# Altium PCB SiPM_Carrier_Board.PcbDoc
Units mm, origin at the board's own origin, x right, y up, seen from the top; angles counter-clockwise.
Board outline 40 x 15 mm, 4 copper layers (Top Layer, GND, Power, Bottom Layer), stack 1.62 mm thick; 26 components, 15 nets, 74 pads, 51 vias.
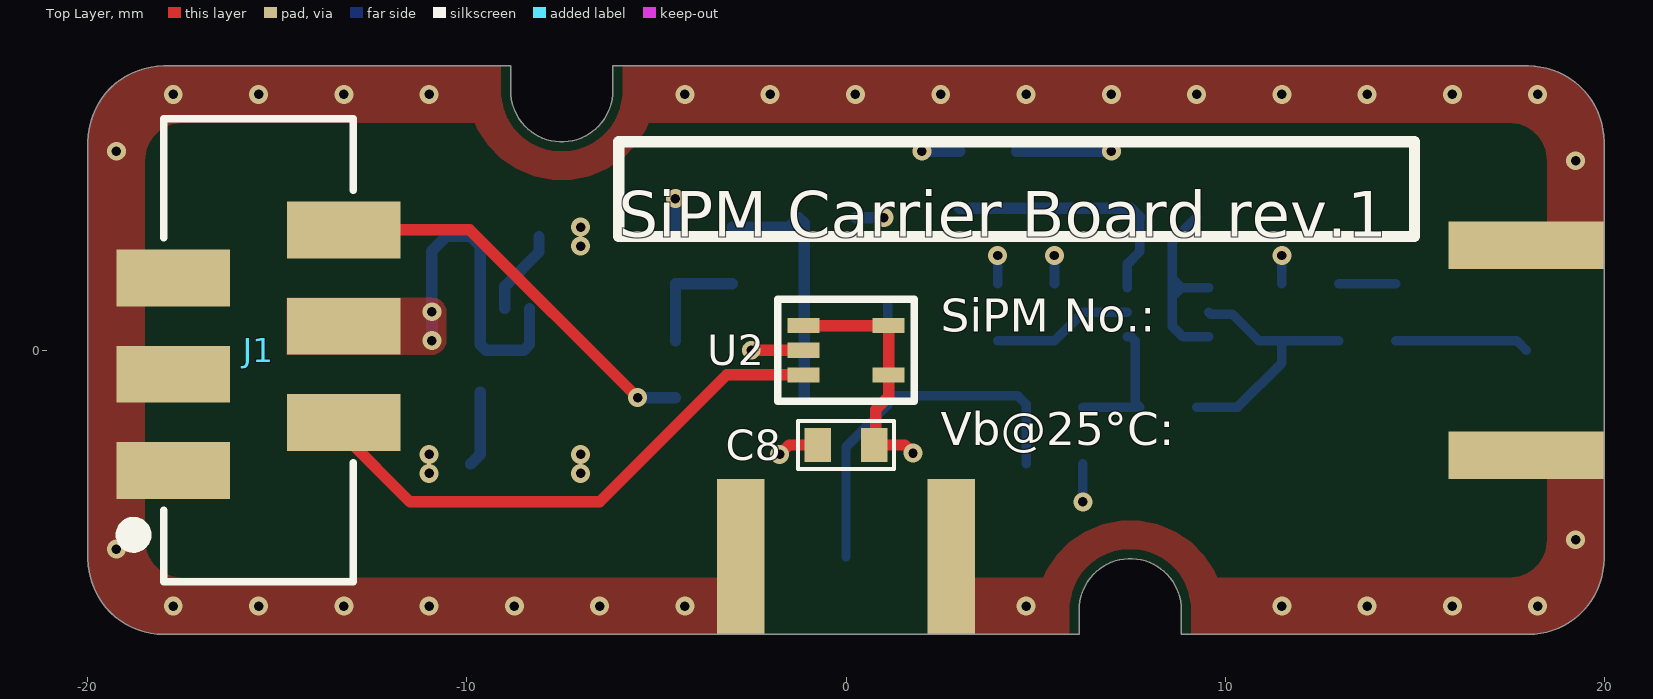
[diagram p0: Top Layer view]
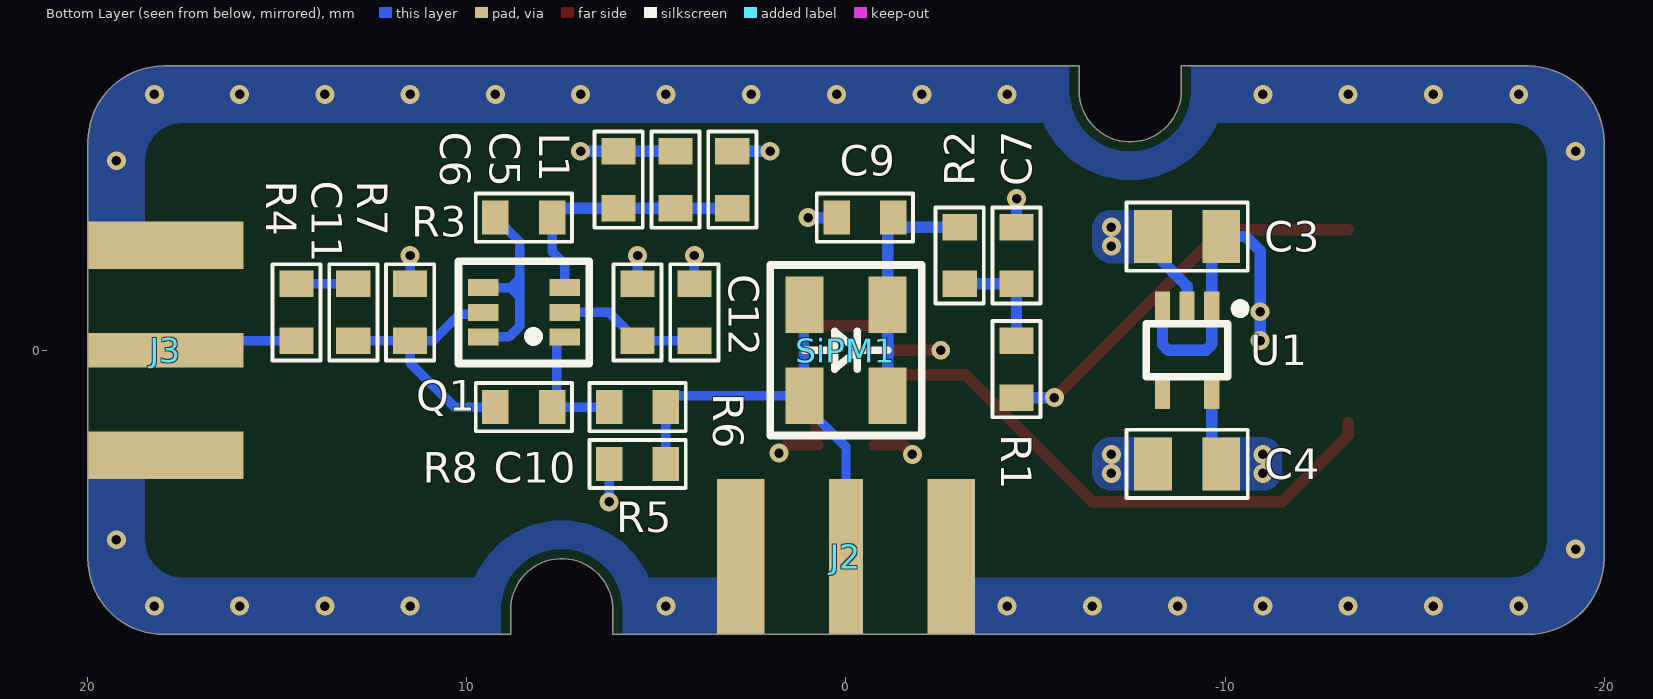
[diagram p1: Bottom Layer view, seen from below]
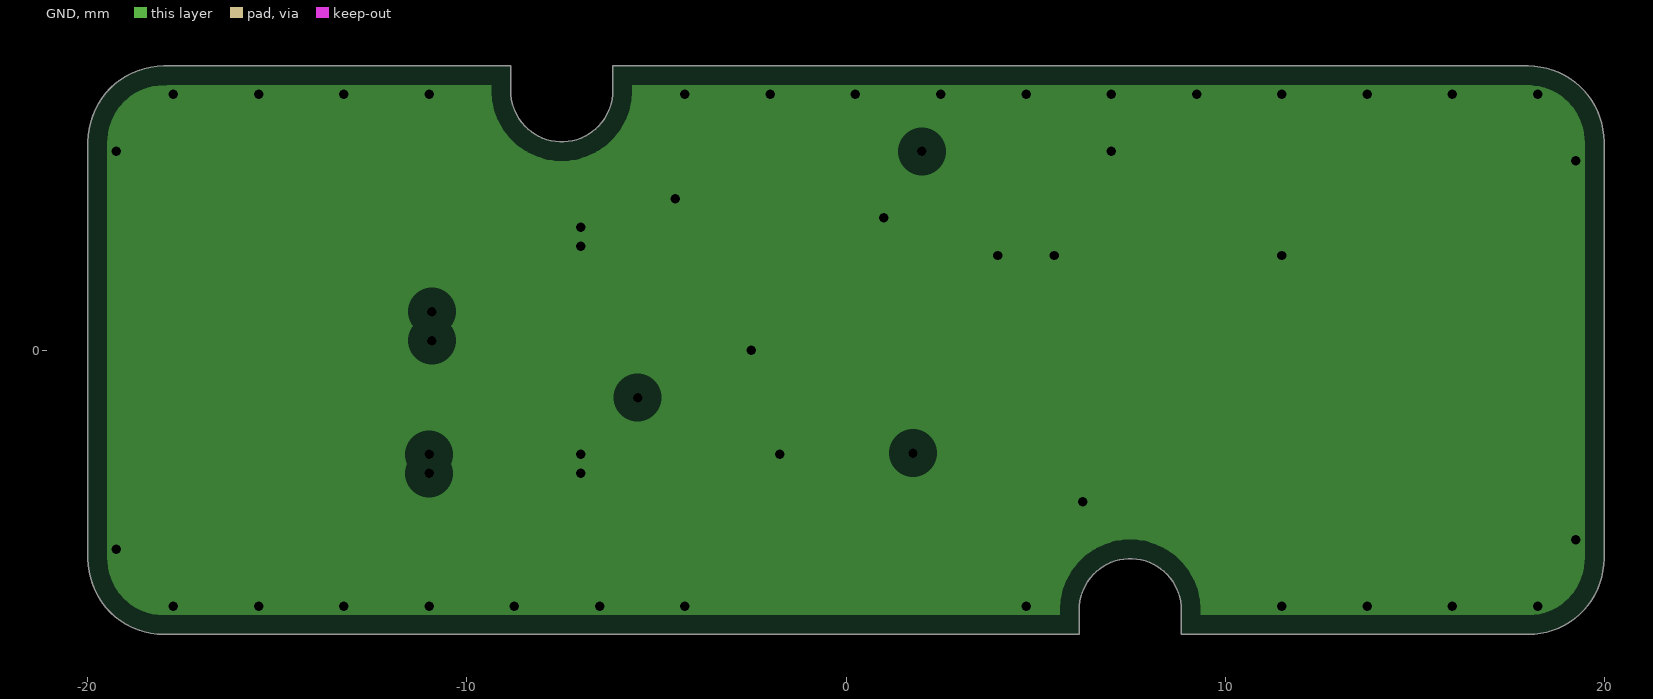
[diagram p2: GND, clearances drawn from the general rule]
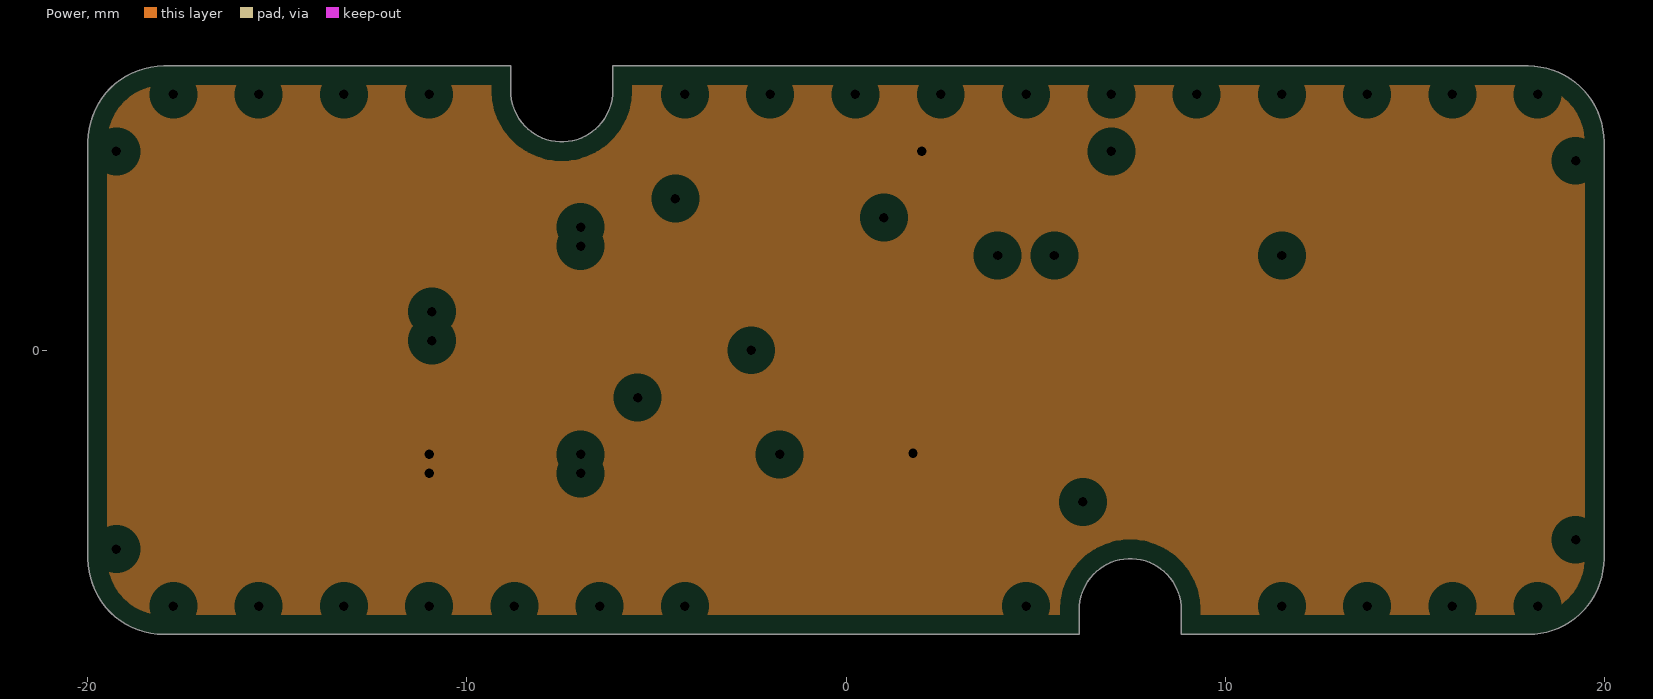
[diagram p3: Power, clearances drawn from the general rule]

## Layer stack, top to bottom
Top Solder: solder mask 0.01, Solder Resist, Dk 3.5
Top Layer: signal copper 0.035
Dielectric 1: prepreg 0.14, PP-006, Dk 4.1
GND: plane copper 0.035, net GND
Dielectric1: core 1.2, FR-4, Dk 4.8
Power: plane copper 0.035, net 3V3_VCC
Dielectric 2: prepreg 0.14, PP-006, Dk 4.1
Bottom Layer: signal copper 0.035
Bottom Solder: solder mask 0.01, Solder Resist, Dk 3.5

## Board outline
-20,-5.5 -20,5.5 cw(c-18,5.5) -18,7.5 -8.85,7.5 -8.85,6.85 ccw(c-7.5,6.85) -6.15,6.85 -6.15,7.5 18,7.5 cw(c18,5.5) 20,5.5 20,-5.5 cw(c18,-5.5) 18,-7.5 8.85,-7.5 8.85,-6.85 ccw(c7.5,-6.85) 6.15,-6.85 6.15,-7.5 -18,-7.5 cw(c-18,-5.5)

## Design rules (kind name [scope] priority, off if disabled: settings)
Clearance [All] p1: gap=0.25 ignorepadtopadclearanceinfootprint=TRUE except(0: Arc-Hole Track-Hole SMDPad-Hole THPad-Hole Via-Hole Fill-Hole Poly-Hole Region-Hole Text-Hole)
FabricationTestPointUsage TestPointUsage [All] p1: valid=0 allowmultiple=FALSE
FabricationTestpoint Testpoint [All] p1: side=3 testpointundercomponent=TRUE minsize=1.016 maxsize=2.54 preferedsize=1.524 minholesize=0 maxholesize=1.016 preferedholesize=0.813 testpointgrid=0.025 allowsidetop=TRUE allowsidebottom=TRUE usegrid=TRUE gridtolerance=0
PlaneClearance [All] p1: clearance=0.508
PlaneConnect [All] p1: planeconnectstyle=Direct reliefexpansion=0.508 reliefentries=4 reliefconductorwidth=0.254 reliefairgap=0.254
PolygonConnect PC_GND [InNet('GND')] p1: thpad.connectstyle=Relief thpad.reliefconductorwidth=0.25 thpad.reliefentries=4 thpad.polygonreliefangle="90 Angle" thpad.airgapwidth=0.25 smdpad.connectstyle=Direct smdpad.reliefconductorwidth=0.25 smdpad.reliefentries=4 smdpad.polygonreliefangle="90 Angle" smdpad.airgapwidth=0.25 via.connectstyle=Direct via.reliefconductorwidth=0.25 via.reliefentries=4 via.polygonreliefangle="45 Angle" via.airgapwidth=0.25
PolygonConnect [All] p2: connectstyle=Direct reliefconductorwidth=0.254 reliefentries=4 polygonreliefangle="90 Angle" airgapwidth=0.254
RoutingVias [All] p1: holewidth=0.711 width=1.27 viastyle="Through Hole" minholewidth=0.711 minwidth=1.27 maxholewidth=0.711 maxwidth=1.27
SilkToSolderMaskClearance SilkscreenOverComponentPads [IsPad] p1: minsilkscreentomaskgap=0.254 clearancetoexposedcopper=TRUE
SolderMaskExpansion [All] p1: expansion=0.102 istentingtop=FALSE
Width [All] p1: maxlimit=1 minlimit=0.2 preferedwidth=0.25
25 further rules are at their usual default settings.

## Components (designator, comment, footprint, x,y, rotation, side; value= is the part's Value field where it differs from the comment)
C3 "1uF 10% 10V" 0805_CAP -9,3 r180 bottom
C4 "1uF 10% 10V" 0805_CAP -9,-3 r180 bottom
C5 "100nF 10% 16V" 0603_CAP 4.5,4.5 r270 bottom
C6 "100nF 10% 16V" 0603_CAP 6,4.5 r270 bottom
C7 "100nF 10% 50V" 0603_CAP -4.5,2.5 r90 bottom
C8 "100nF 10% 16V" 0603_CAP 0,-2.5 r0 top
C9 "100nF 10% 50V" 0603_CAP -0.5,3.5 r0 bottom
C10 "100nF 10% 16V" 0603_CAP 5.5,-1.5 r0 bottom
C11 "100nF 10% 16V" 0603_CAP 13,1 r90 bottom
C12 "10nF 10% 16V" 0603_CAP 4,1 r270 bottom
J1 "690367290676" 690367290676 -15.5,0 r270 top
J2 "60312202111527" 60312202111527 0,-7.5 r180 bottom
J3 "60312202111527" 60312202111527 20,0 r270 bottom
L1 "742861210" 0603_RES 3,4.5 r270 bottom
Q1 "BFU520Y" SOT363-6 8.5,1 r0 bottom
R1 "100R 1% 0.1W" 0603_RES -4.5,-0.5 r90 bottom
R2 "100R 1% 0.1W" 0603_RES -3,2.5 r90 bottom
R3 "1k 1% 0.1W" 0603_RES 8.5,3.5 r0 bottom
R4 "49R9 1% 0.1W" 0603_RES 14.5,1 r90 bottom
R5 "10k 1% 0.1W" 0603_RES 5.5,-3 r0 bottom
R6 "750R 1% 0.1W" 0603_RES 5.5,1 r90 bottom
R7 "200R 1% 0.1W" 0603_RES 11.5,1 r90 bottom
R8 "1k 1% 0.1W" 0603_RES 8.5,-1.5 r180 bottom
SiPM1 "PM3375T" PM3375T_SMD 0,0 r180 bottom locked
U1 "TLV70033DCKR" TI-DCK5_V -9,0 r270 bottom
U2 "LM94021" SC70 0,0 r0 top

## Footprints (in the part's own frame and the unit in brackets; to place one, negate y for a bottom-side part, rotate by r counter-clockwise, add the part's x,y. Pads: shape width x height; smd on the part's side, far side on the other; paste and mask are expansions set on the pad)
0603_CAP [mm] "Chip Capacitor, 1.6mm x 0.8mm x 0.45mm"
  rect 0.7x0.9 smd: 1(-0.75,0) 2(0.75,0)
  silkscreen extent -1.27,-0.64 1.27,0.64, body extent -0.8,-0.4 0.8,0.4, height 0.45
0603_RES [mm] "Chip Resistor, 1.6mm x 0.8mm x 0.45mm"
  rect 0.7x0.9 smd: 1(-0.75,0) 2(0.75,0)
  silkscreen extent -1.27,-0.64 1.27,0.64, body extent -0.8,-0.4 0.8,0.4, height 0.45
0805_CAP [mm] "Chip Capacitor, 2.0mm x 1.25mm x 0.55mm"
  rect 1x1.4 smd: 1(-0.9,0) 2(0.9,0)
  silkscreen extent -1.6,-0.9 1.6,0.9, body extent -1,-0.62 1,0.63, height 0.55
690367290676 [mm] "MiniModule Connectors, PCB Type, Female, SMT, Vertical, 6p"
  rect 1.5x3 smd: 1(3.175,-2.25) 2(1.905,2.25) 3(0.635,-2.25) 4(-0.635,2.25) 5(-1.905,-2.25) 6(-3.175,2.25)
  silkscreen extent -6.11,-3.52 6.11,2.5, body extent -6.11,-3.5 6.11,3.5, height 5.75
60312202111527 [mm] "SMA PCB End Launch  Jack"
  rect 0.9x4.1 smd: 1(0,2.05)
  rect 1.25x4.1 smd: 2(-2.775,2.05) 3(2.775,2.05)
  rect 1.25x4.1 smd far side: 4(-2.775,2.05) 5(2.775,2.05)
  body extent -3.18,-9.52 3.17,3.81, height 3.55
PM3375T_SMD [mm]
  rect 1x1.5 smd: 1(1.1,-1.2) 1(1.1,1.2) 2(-1.1,-1.2) 2(-1.1,1.2)
  silkscreen extent -2,-2.25 2,2.25, body extent -1.9,-2.15 1.9,2.15, height 1.75
SC70 [mm] "SOT23, 5-Leads, Body 2.00x2.10mm, Pitch 0.65mm, IPC Medium Density"
  rect 0.85x0.4 smd: 1(-1.125,0.65) 2(-1.125,0) 3(-1.125,-0.65) 4(1.125,-0.65) 5(1.125,0.65)
  silkscreen extent -1.8,-1.35 1.8,1.35, body extent -1.2,-1.07 1.2,1.07, height 1.1
SOT363-6 [mm] "SOT23, 6-Leads, Body 2,00x2,10mm, Pitch 0,65mm, IPC Medium Density"
  rect 0.8x0.45 smd: 1(-1.075,0.65) 2(-1.075,0) 3(-1.075,-0.65) 4(1.075,-0.65) 5(1.075,0) 6(1.075,0.65)
  silkscreen extent -1.73,-1.35 1.73,1.35, body extent -1.15,-1.1 1.15,1.1, height 1.1
TI-DCK5_V [mm] "SOT23, 5-Leads, Body 2x1.25mm, Pitch 0.65mm"
  rect 0.9x0.4 smd: 1(-1.1,0.65) 2(-1.1,0) 3(-1.1,-0.65) 4(1.1,-0.65) 5(1.1,0.65)
  silkscreen extent -1.22,-1.07 0.7,1.52, body extent -0.63,-1 0.63,1, height 1.1

## Part data
C3 C4 C5 C6 C7 C8 C9 C10 C11 C12: library part Capacitor, "Simple generic capacitor."
  C3 C4: PackageReference=0805
  C5 C6 C7 C8 C9 C10 C11 C12: PackageReference=0603
J1: "WR-MM MiniModule Connector, Female, SMT, Vertical, pitch 2.54mm, 6pins", Contact Resistance=10mOhm, Insulation Resistance=>1000MOhm, Operating Temperature="-40 to +105degC", Rated Current=1.5A, Withstanding Voltage=500VAC, Working Voltage=100VAC, ComponentLink1Description=Manufacturer, ComponentLink1URL=http://www.we-online.de, ComponentLink2Description=Datasheet, ComponentLink2URL=https://katalog.we-online.de/em/datasheet/690367290676.pdf, Gender=Female, Mounting Technology=SMT, Orientation=Vertical, Packaging="Tape and Reel", Part Number=690367290676, Pin Number=6, Pitch=2.54mm, Published Date="June 2019", Publisher="Wurth Elektronik"
J2 J3: "WR-SMA PCB End Launch Jack Round Post for 1.6mm PCB, SMT, Straight", Frequency Range=DC~18GHz, Operating Temperature="-65 to +165degC", Center Contact Diameter=0.76mm, ComponentLink1Description=Manufacturer, ComponentLink1URL=http://www.we-online.de, ComponentLink2Description=Datasheet, ComponentLink2URL=https://katalog.we-online.com/em/datasheet/60312202111527.pdf, Connector Type=SMA, Gender=Jack, Impedance=50Ohm, Interface=MIL-STD-348, Mounting Technology=SMT, Orientation Type=Straight, Packaging=Tray, Part Number=60312202111527, Published Date="May 2019", Publisher="Wurth Elektronik"
L1: library part Inductor, "Simple generic inductor.", PartNumber=XXX, PackageReference=0603
Q1: "Dual NPN wideband silicon RF transistor.", PackageReference=SOT363-6
R1 R2 R3 R4 R5 R6 R7 R8: library part Resistor, "Simple generic resistor.", PackageReference=0603
SiPM1: "Silicon Photomultiplier, 3x3mm2 - 75um type - trench - SMD housing"
U1: "Single Output LDO, 200 mA, Fixed 3.3 V Output, 2 to 5.5 V Input, with Low IQ, 5-pin SC70 (DCK), -40 to 125 degC, Green (RoHS & no Sb/Br)", Manufacturer="Texas Instruments", Supplier Part Number 1=296-32413-2-ND, Accuracy(%)=2, Code_JEDEC=MO-203, ComponentLink1Description="Manufacturer URL", ComponentLink1URL=http://www.ti.com/, ComponentLink2Description=Datasheet, ComponentLink2URL=http://www.ti.com/general/docs/lit/getliterature.tsp?genericPartNumber=TLV70033&fileType=pdf, ComponentLink3Description="Package Specification", ComponentLink3URL=http://www.ti.com/litv/pdf/mpds025f, DatasheetVersion=SLVSA00D, Eco-Plan="Green (RoHS & no Sb/Br)", Fixed Output Options(V)=3.3, Iout(Max)(A)=0.2, Iq(Typ)(mA)=0.03, Mounting Technology="Surface Mount", PackageDescription="5-Pin Plastic Small-Outline, Body 2 x 1.25 mm, Pitch 0.65 mm", PackageReference=DCK5, PackageVersion=4093553-3/G, PartNumber=TLV70033DCKR, SubFamily="Single Channel LDO", Supplier 1=Digi-Key, Supplier 2=Digi-Key, Supplier 3=Digi-Key, Supplier 4=Newark, Supplier 5=Mouser, Supplier Part Number 2=296-32413-1-ND, Supplier Part Number 3=296-32413-6-ND, Supplier Part Number 4=55R7467, Supplier Part Number 5=595-TLV70033DCKR, Vdo(Typ)(mV)=175, Vin(Max)(V)=5.5, Vin(Min)(V)=2, Vout Adj(Max)(V)=3.3, Vout Adj(Min)(V)=3.3
U2: "Multi-Gain Analog Temperature Sensor.", Manufacturer="Texas Instruments", PartNumber=LM94021BIMG, PackageReference=SC70

## Via types
v1: diameter 0.5, hole 0.25, Top Layer to Bottom Layer, 32 vias
v2: diameter 0.5, hole 0.25, Top Layer to Bottom Layer, tented both sides, 19 vias

## Nets (pads, with @x,y where several pads share a name; then routed paths per layer and width w, separated by ;. In a path a pad name is that pad's centre, name@x,y a point inside that pad or via, vN(x,y) a via of type N, cw(c..) or ccw(c..) an arc to the next point about the centre after c; other vN are vias at no path point)
3V3_AMP: C5.2 C6.2 L1.2 Q1.3 R3.1 | length 6.8
  Bottom Layer w0.254: Q1.3 7.425,2.275 7.75,2.6 R3.1
  Bottom Layer w0.3: L1.2 C5.2 C6.2 7.5,3.75 R3.1
3V3_VCC: C4.2 C8.2 L1.1 U1.5 U2.1 U2.4 U2.5 | length 9.7
  Top Layer w0.3: U2.1 U2.5 U2.4 1.125,-1.225 0.785,-1.565 0.785,-2.465 C8.2 1.554,-2.5 v2(1.768,-2.714)
  Bottom Layer w0.3: C4.2 -9.65,-2.75 U1.5 ; v2(2,5.25) L1.1
  other v2: -11,-3.25 -11,-2.75
5V_IN: C3.2 J1.4 U1.1 U1.3 | length 8.9
  Bottom Layer w0.3: v2(-10.928,0.254) v2(-10.928,1.016) -10.928,2.617 -10.545,3 C3.2 -9.65,2.75 U1.1 -9.65,0.15 -9.5,0 -8.5,0 -8.35,0.15 U1.3
GND: C3.1 C4.1 C5.1 C6.1 C7.2 C8.1 C9.2 C12.1 J1.1 J1.3 J1.5 J2.2 J2.3 J2.4 J2.5 J3.2 J3.3 J3.4 J3.5 R5.2 R6.2 R7.2 U1.2 U2.2 | length 12
  Top Layer w0.3: v2(-2.5,0) U2.2 ; v2(-1.75,-2.75) -1.5,-2.5 C8.1
  Bottom Layer w0.254: C12.1 v2(4,2.5) ; R6.2 v2(5.5,2.5) ; v2(6.25,-4) R5.2 ; R7.2 v2(11.5,2.5)
  Bottom Layer w0.3: U1.2 -9,1.691 -8.1,2.591 C3.1 ; C7.2 v2(-4.5,4) ; C9.2 v2(1,3.5) ; C5.1 C6.1 v2(7,5.25)
  other v1: -17.75,-6.75 -15.5,-6.75 -13.25,-6.75 -11,-6.75 -8.75,-6.75 -6.5,-6.75 -4.25,-6.75 4.75,-6.75 11.5,-6.75 13.75,-6.75 16,-6.75 18.25,-6.75 -19.25,-5.25 19.25,-5 19.25,5 -19.25,5.25 -17.75,6.75 -15.5,6.75 -13.25,6.75 -11,6.75 -4.25,6.75 -2,6.75 0.25,6.75 2.5,6.75 4.75,6.75 7,6.75 9.25,6.75 11.5,6.75 13.75,6.75 16,6.75 18.25,6.75
  other v2: -7,-3.25 -7,-2.75 -7,2.75 -7,3.25
NetC7_1: C7.1 R1.2 R2.1 | length 3
  Bottom Layer w0.3: R1.2 C7.1 R2.1
NetC9_1: C9.1 R2.2 SiPM1.1 | length 6.6
  Bottom Layer w0.3: R2.2 -1.5,3.25 C9.1 -1.1,3.35 -1.1,1.2 SiPM1.1@-1.1,-1.2
NetC10_1: C10.1 J2.1 R5.1 SiPM1.2 | length 12.4
  Bottom Layer w0.25: J2.1 0,-2.55 1.1,-1.45 SiPM1.2@1.1,-1.2 ; SiPM1.2@1.1,1.2 SiPM1.2@1.1,-1.2 ; R5.1 C10.1 4.75,-1.423 4.527,-1.2 SiPM1.2@1.1,-1.2
NetC10_2: C10.2 Q1.1 R8.2 | length 3.5
  Bottom Layer w0.25: C10.2 7.628,-1.5 R8.2 7.628,-1.378 7.628,0.252 7.53,0.35 Q1.1
NetC11_1: C11.1 Q1.5 R7.1 R8.1 | length 7.1
  Bottom Layer w0.25: R8.1 10.334,-1.5 11.5,-0.334 R7.1 ; Q1.5 9.623,0.952 10.191,0.952 10.893,0.25 R7.1 ; C11.1 R7.1
NetC11_2: C11.2 R4.2 | length 1.5
  Bottom Layer w0.254: C11.2 R4.2
NetC12_2: C12.2 Q1.2 R6.1 | length 3.7
  Bottom Layer w0.25: C12.2 R6.1 6.25,1 Q1.2
NetJ3_1: J3.1 R4.1 | length 3.6
  Bottom Layer w0.25: R4.1 17.7,0.25 J3.1
NetQ1_4: Q1.4 Q1.6 R3.2 | length 5.6
  Bottom Layer w0.25: R3.2 8.614,2.864 8.614,1.884 ; Q1.6 8.892,0.35 8.614,0.628 8.614,1.416 ; Q1.4 8.848,1.65 ; 8.614,1.416 8.614,1.884 ; 8.614,1.416 8.848,1.65 ; 8.614,1.884 8.848,1.65
T_OUT: J1.2 U2.3 | length 14.6
  Top Layer w0.3: J1.2 -13.25,-2.25 -11.5,-4 -6.5,-4 -3.15,-0.65 U2.3
VBIAS: J1.6 R1.1 | length 10.6
  Top Layer w0.3: J1.6 -9.925,3.175 v1(-5.5,-1.25)
  Bottom Layer w0.3: v1(-5.5,-1.25) R1.1
pads on no net: U1.4

## Polygon pours and split planes (outlines as drawn)
GND on Bottom Layer "GND_L04_P018" (solid, pour order 18): 10,-7 ccw(c7.5,-7) 7.5,-4.5 ccw(c7.5,-7) 5,-7
GND on Bottom Layer "GND_L04_P016" (solid, pour order 16): -10,7 ccw(c-7.5,7) -7.5,4.5 ccw(c-7.5,7) -5,7
GND on Bottom Layer "GND_L04_P013" (solid, pour order 13): 2.5,-7.5 2.5,-6 17.5,-6 ccw(c17.5,-5) 18.5,-5 18.5,-2.5 20,-2.5 20,-5.5 cw(c18,-5.5) 18,-7.5
GND on Bottom Layer "GND_L04_P012" (solid, pour order 12): -2.5,-7.5 -18,-7.5 cw(c-18,-5.5) -20,-5.5 -20,5.5 cw(c-18,5.5) -18,7.5 18,7.5 cw(c18,5.5) 20,5.5 20,2.5 18.5,2.5 18.5,5 ccw(c17.5,5) 17.5,6 -17.5,6 ccw(c-17.5,5) -18.5,5 -18.5,-5 ccw(c-17.5,-5) -17.5,-6 -2.5,-6
GND on Bottom Layer "GND_L04_P005" (solid, pour order 5): -8.6,2.3 -7,2.3 ccw(c-7,2.8) -6.5,2.8 -6.5,3.2 ccw(c-7,3.2) -7,3.7 -8.6,3.7
GND on Bottom Layer "GND_L04_P004" (solid, pour order 4): -8.6,-3.7 -7,-3.7 ccw(c-7,-3.2) -6.5,-3.2 -6.5,-2.8 ccw(c-7,-2.8) -7,-2.3 -8.6,-2.3
3V3_VCC on Bottom Layer "3V3_VCC_L04_P003" (solid, pour order 3): -9.4,-3.7 -11,-3.7 cw(c-11,-3.2) -11.5,-3.2 -11.5,-2.8 cw(c-11,-2.8) -11,-2.3 -9.4,-2.3
no net on Bottom Layer "NONET_L04_P002" (solid, pour order 2): -9.4,-2.3
GND on Top Layer "GND_L01_P019" (solid, pour order 19): 10,-7 ccw(c7.5,-7) 7.5,-4.5 ccw(c7.5,-7) 5,-7
GND on Top Layer "GND_L01_P017" (solid, pour order 17): -10,7 ccw(c-7.5,7) -7.5,4.5 ccw(c-7.5,7) -5,7
GND on Top Layer "GND_L01_P014" (solid, pour order 14): -2.5,-7.5 -18,-7.5 cw(c-18,-5.5) -20,-5.5 -20,5.5 cw(c-18,5.5) -18,7.5 18,7.5 cw(c18,5.5) 20,5.5 20,2.5 18.5,2.5 18.5,5 ccw(c17.5,5) 17.5,6 -17.5,6 ccw(c-17.5,5) -18.5,5 -18.5,-5 ccw(c-17.5,-5) -17.5,-6 -2.5,-6
GND on Top Layer "GND_L01_P015" (solid, pour order 15): 2.5,-7.5 2.5,-6 17.5,-6 ccw(c17.5,-5) 18.5,-5 18.5,-2.5 20,-2.5 20,-5.5 cw(c18,-5.5) 18,-7.5
5V_IN on Top Layer "5V_IN_L01_P006" (solid, pour order 6): -14.75,-0.115 -10.924,-0.115 ccw(c-10.924,0.256) -10.552,0.256 -10.553,1.008 ccw(c-10.93,1.008) -10.93,1.385 -14.75,1.385
GND on GND (split plane): 154 vertices, not listed, extent -19.491,-6.991 19.491,6.991
3V3_VCC on Power (split plane): 154 vertices, not listed, extent -19.491,-6.991 19.491,6.991

## Silkscreen, mask and mechanical layers (free items; w line width, h text height)
Top Overlay:
  lines w0.3: -6,3 -6,5.5 15,5.5 15,3 -6,3
  text "SiPM Carrier Board rev.1" at -6,3 h1.2
  text "SiPM No.: /  / Vb@25°C:" at 2.5,-2.8 h1.5
Outline:
  the board outline again, w0.2
Mechanical 16:
  lines w0.127: -100,-44.24 -94.92,-44.24 ; -100,4.02 -94.92,4.02 ; -100,52.28 -94.92,52.28 ; -26.975,-92.5 -26.975,-87.42 ; -26.975,95.46 -26.975,100.54 ; 46.05,-92.5 46.05,-87.42 ; 46.05,95.46 46.05,100.54 ; 119.075,-92.5 119.075,-87.42 ; 119.075,95.46 119.075,100.54 ; 187.02,-44.24 192.1,-44.24 ; 187.02,4.02 192.1,4.02 ; 187.02,52.28 192.1,52.28 ; -100,-92.5 192.1,-92.5 192.1,100.54 -100,100.54 -100,-92.5 ; -94.92,-87.42 -94.92,95.46 187.02,95.46 187.02,-87.42 -94.92,-87.42
  text "1" at -63.754,97.111 h1.78
  text "2" at 8.89,97.111 h1.78
  text "3" at 82.042,97.111 h1.78
  text "4" at 154.94,97.111 h1.78
  text "A" at -98.095,74.099 h1.78
  text "A" at 188.925,74.099 h1.78
  text "B" at -98.095,26.042 h1.78
  text "B" at 188.925,26.042 h1.78
  text "C" at -98.095,-22.472 h1.78
  text "C" at 188.925,-22.472 h1.78
  text "D" at -98.095,-70.478 h1.78
  text "D" at 188.925,-70.478 h1.78
  text "1" at -63.754,-90.849 h1.78
  text "2" at 8.89,-90.849 h1.78
  text "3" at 82.042,-90.849 h1.78
  text "4" at 154.94,-90.849 h1.78

## Dimensions
-20,-7.5 to 20,-7.5 on Mechanical 16
20,7.5 to 20,-7.5 on Mechanical 16

## Text inside footprints (layer, text, board x,y; h text height)
J2: Mechanical 2 "PCB END" at 2.2,-8.75 h0.76
J3: Mechanical 2 "PCB END" at 21.25,2.2 h0.76 r90